# Altium PCB wzy_PCB1_01.PcbDoc
Units mil, origin at the board's own origin, x right, y up, seen from the top; angles counter-clockwise.
Board outline 3220.03 x 2005.03 mil, 2 copper layers (Top Layer, Bottom Layer); 58 components, 42 nets, 180 pads, 181 vias.
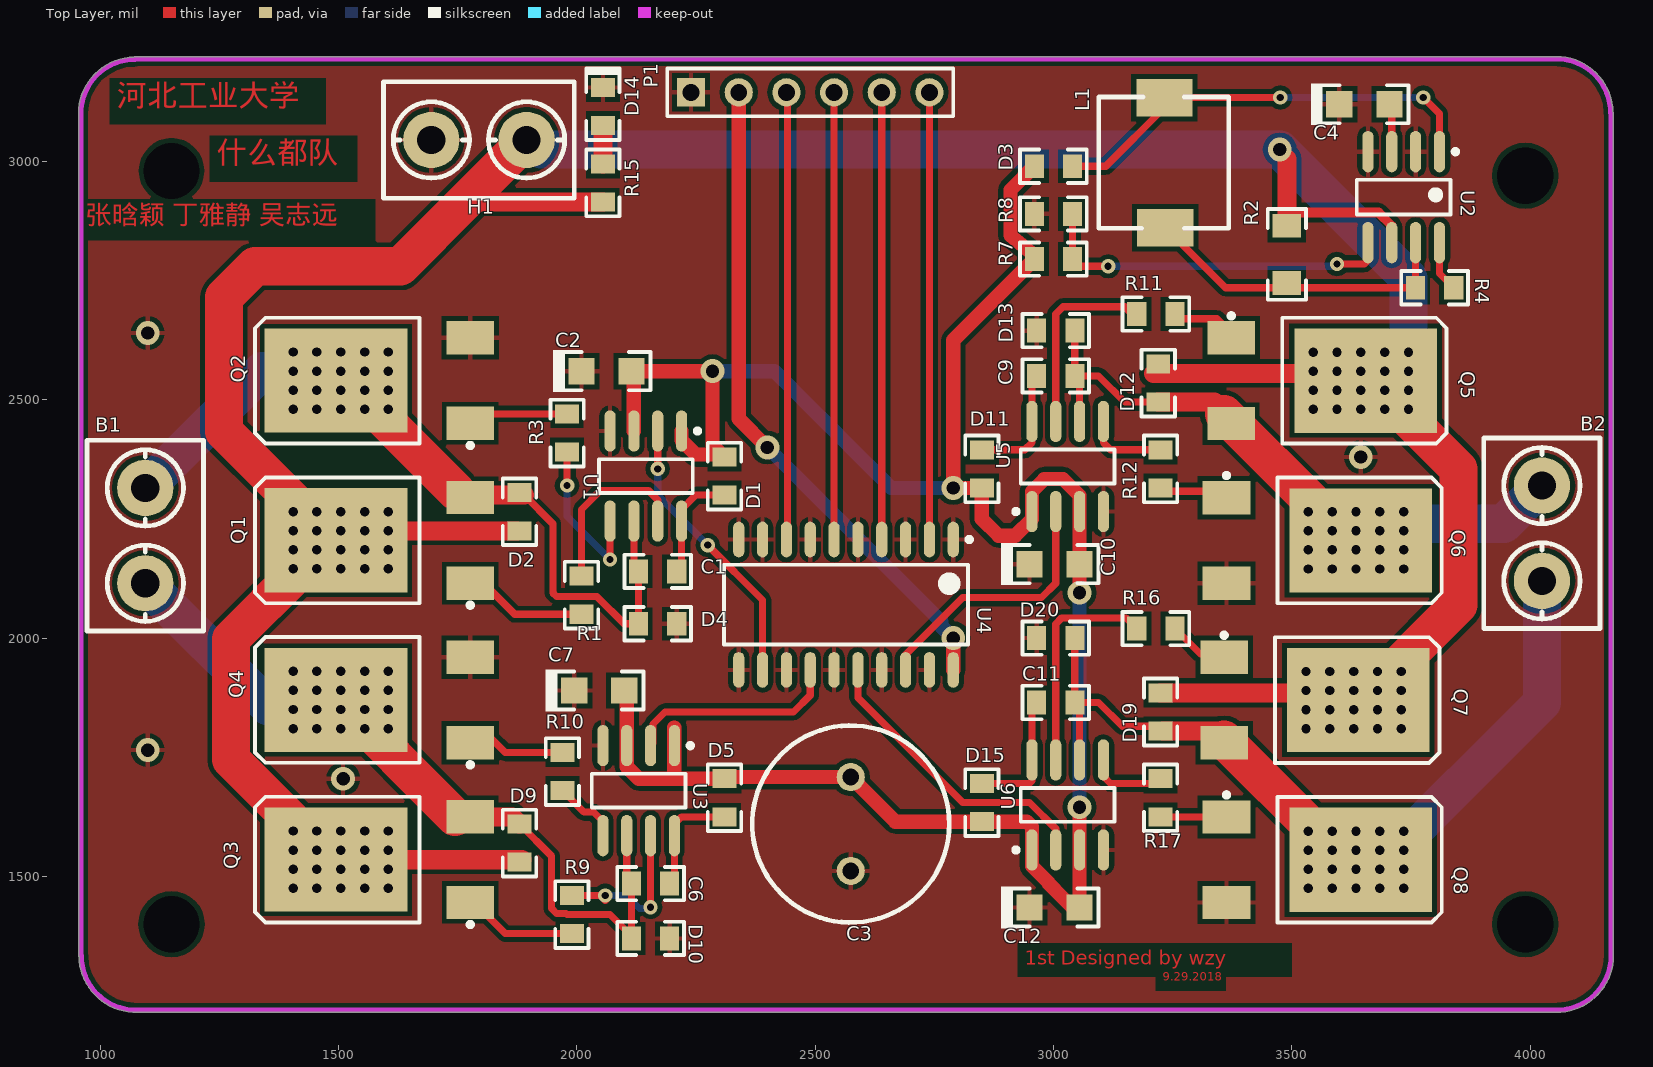
[diagram p0: Top Layer view]
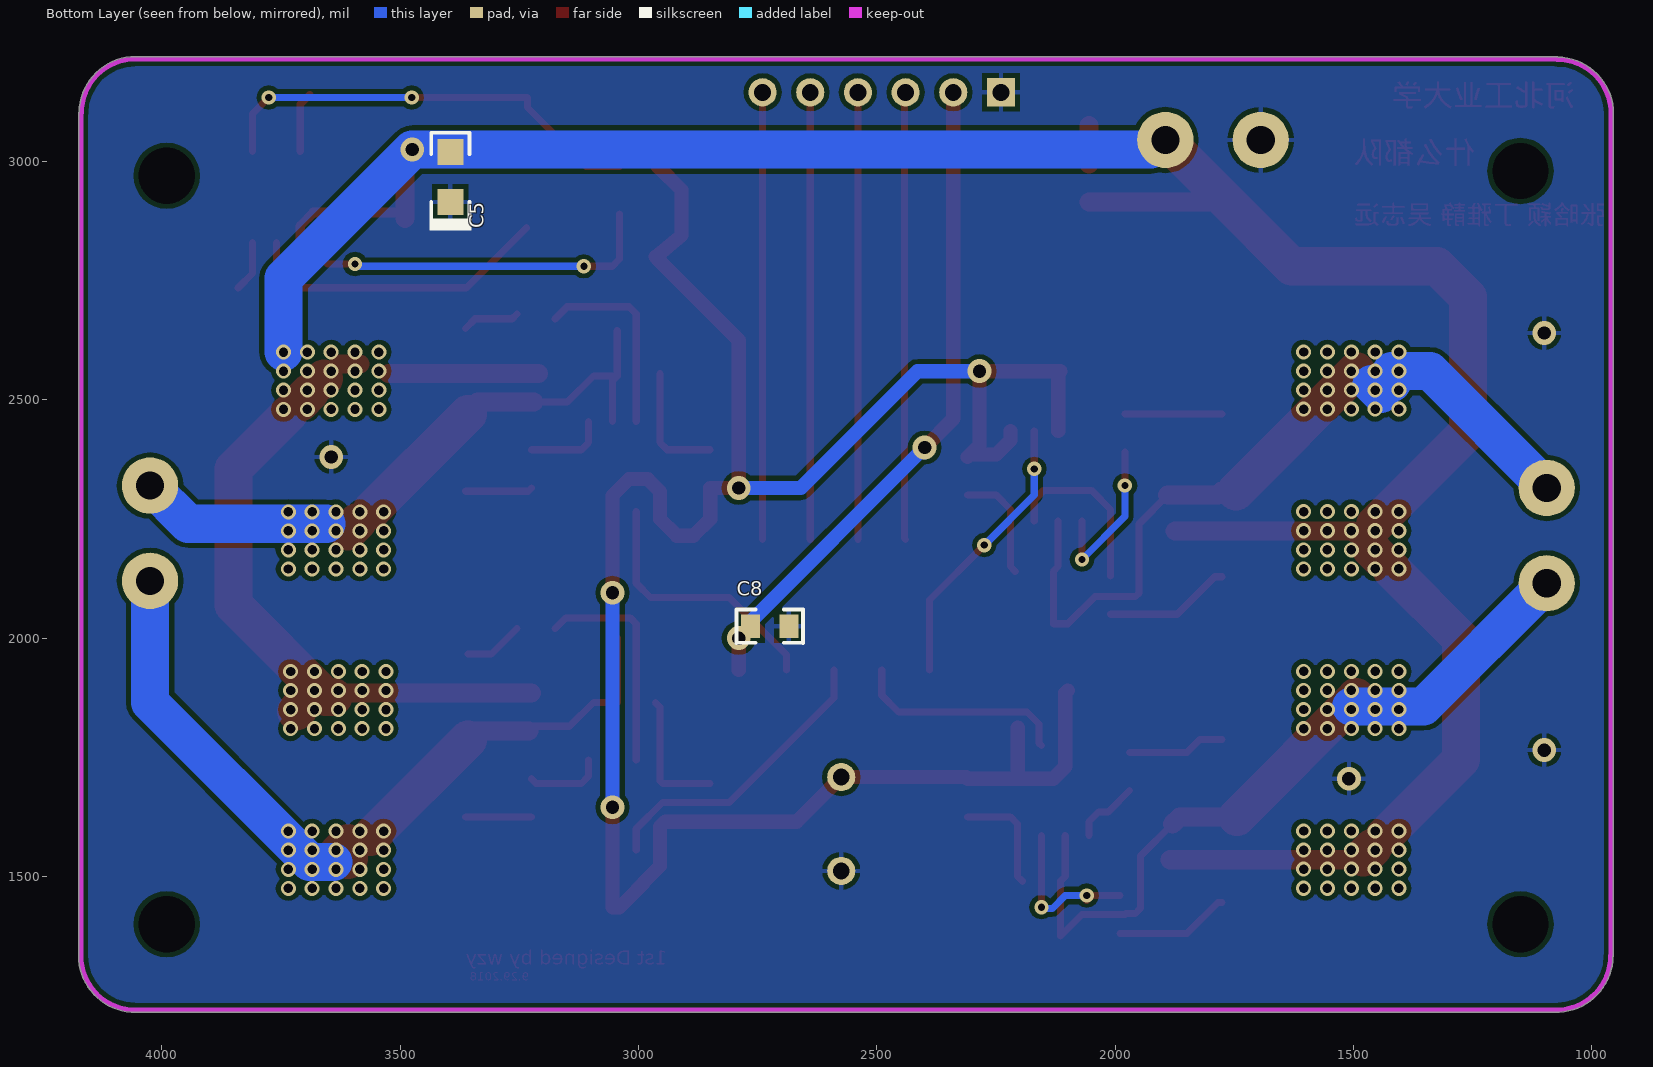
[diagram p1: Bottom Layer view, seen from below]

## Layer stack, top to bottom
Top Layer: signal copper 1.4
Dielectric: dielectric 12.6, FR-4, Dk 4.8
Bottom Layer: signal copper 1.4

## Board outline
1068.72,1215.15 cw(c1075,1334.02) 955.98,1332 cw(c960,1335) 954.99,1335 954.99,3100 cw(c1074.02,3100) 1072,3219.02 cw(c1075,3215) 1075,3220.01 4055,3220.01 cw(c4055,3100.98) 4174.02,3103 cw(c4170,3100) 4175.02,3100 4175.02,1410 cw(c4170,1410) 4175.01,1409.71 4175.01,1334.01 cw(c4055.97,1334.01) 4054.97,1214.98 cw(c4055.97,1334.01) 4054.96,1214.99 4055,1214.98 1070,1214.98 cw(c1070,1220)

## Design rules (kind name [scope] priority, off if disabled: settings)
Clearance [All] p1: gap=10
PolygonConnect [All] p1: connectstyle=Relief reliefconductorwidth=10 reliefentries=4 polygonreliefangle="90 Angle" airgapwidth=10
RoutingVias [All] p1: holewidth=28 width=50 viastyle="Through Hole" minholewidth=28 minwidth=50 maxholewidth=28 maxwidth=50
SolderMaskExpansion [All] p1: expansion=4
Width [All] p1: maxlimit=100 minlimit=1 preferedwidth=10 minimp=50.000000 maximp=50.000000 favimp=50.000000
28 further rules are at their usual default settings.

## Components (designator, comment, footprint, x,y, rotation, side; value= is the part's Value field where it differs from the comment)
B1 "Motor" KF301-2P 1095,2215 r180 top
B2 "Motor" KF301-2P 4025,2220 r180 top
C1 "Cap" 0805(2012) 2170,2140 r180 top
C2 "Cap Pol1" SOD-323(0805) 2060,2560 r180 top
C3 "Cap Pol1" RB5-10.5 2575,1610 r270 top
C4 "Cap Pol1" SOD-323(0805) 3650,3120 r180 top
C5 "Cap Pol1" SOD-323(0805) 3395,2965 r270 bottom
C6 "Cap" 0805(2012) 2155,1485 r180 top
C7 "Cap Pol1" SOD-323(0805) 2045,1890 r180 top
C8 "Cap" 0805(2012) 2725,2025 r0 bottom
C9 "Cap" 0805(2012) 3005,2550 r0 top
C10 "Cap Pol1" SOD-323(0805) 3000,2155 r180 top
C11 "Cap" 0805(2012) 3005,1865 r0 top
C12 "Cap Pol1" SOD-323(0805) 3000,1435 r180 top
D1 "1N5819" 0805(2012) 2310,2340 r90 top
D2 "1N5819" 0805(2012) 1880,2265 r90 top
D3 "1N5819" 0805(2012) 3000,2990 r0 top
D4 "1N5819" 0805(2012) 2170,2030 r0 top
D5 "1N5819" 0805(2012) 2310,1665 r90 top
D9 "1N5819" 0805(2012) 1880,1570 r90 top
D10 "1N5819" 0805(2012) 2155,1370 r0 top
D11 "1N5819" 0805(2012) 2850,2355 r270 top
D12 "1N5819" 0805(2012) 3220,2535 r270 top
D13 "1N5819" 0805(2012) 3005,2645 r180 top
D14 "RED" 0805LED 2055,3115 r90 top
D15 "1N5819" 0805(2012) 2850,1655 r270 top
D19 "1N5819" 0805(2012) 3225,1845 r270 top
D20 "1N5819" 0805(2012) 3005,2000 r180 top
H1 "POWER IN" KF301-2P 1795,3045 r270 top
L1 "Inductor" diangan 3155,3160 r90 top
P1 "PWM" HDR1X6 2240,3145 r0 top
Q1 "IR7843" LR7843 1635,2205.2 r0 top
Q2 "IR7843" LR7843 1635,2540.2 r0 top
Q3 "IR7843" LR7843 1635,1535.2 r0 top
Q4 "IR7843" LR7843 1635,1870.2 r0 top
Q5 "IR7843" LR7843 3515,2540 r180 top
Q6 "IR7843" LR7843 3505,2205 r180 top
Q7 "IR7843" LR7843 3500,1870 r180 top
Q8 "IR7843" LR7843 3505,1535 r180 top
R1 "Res2" 0805(2012) 2010,2090 r270 top
R2 "Res2" 1206(3216) 3560,2860 r90 top
R3 "Res2" 0805(2012) 1980,2430 r90 top
R4 "Res2" 0805(2012) 3800,2735 r180 top
R7 "Res2" 0805(2012) 3000,2795 r0 top
R8 "Res2" 0805(2012) 3000,2890 r0 top
R9 "Res2" 0805(2012) 1990,1420 r270 top
R10 "Res2" 0805(2012) 1970,1720 r90 top
R11 "Res2" 0805(2012) 3215,2680 r0 top
R12 "Res2" 0805(2012) 3225,2355 r270 top
R15 "Res2" 0805(2012) 2055,2955 r90 top
R16 "Res2" 0805(2012) 3215,2020 r0 top
R17 "Res2" 0805(2012) 3225,1665 r270 top
U1 "IR2104S" IR2104S 2145,2340 r270 top
U2 "MC34063" MC34063 3735,2925 r270 top
U3 "IR2104S" IR2104S 2130,1680 r270 top
U4 "74LS244" 74ls244DA 2595,2150 r270 top
U5 "IR2104S" IR2104S 3030,2360 r90 top
U6 "IR2104S" IR2104S 3030,1650 r90 top

## Footprints (in the part's own frame and the unit in brackets; to place one, negate y for a bottom-side part, rotate by r counter-clockwise, add the part's x,y. Pads: shape width x height; smd on the part's side, far side on the other; paste and mask are expansions set on the pad)
74ls244DA [mm]
  oval 1.9x0.6 smd: 1(-1.443,4.953) 2(-1.443,3.683) 3(-1.443,2.413) 4(-1.443,1.143) 5(-1.443,-0.127) 6(-1.443,-1.397) 7(-1.443,-2.667) 8(-1.443,-3.937) 9(-1.443,-5.207) 10(-1.443,-6.477) 11(5.507,-6.477) 12(5.507,-5.207) 13(5.507,-3.937) 14(5.507,-2.667) 15(5.507,-1.397) 16(5.507,-0.127) 17(5.507,1.143) 18(5.507,2.413) 19(5.507,3.683) 20(5.507,4.953)
  silkscreen extent -1.57,-7.26 4.16,5.93, body extent -0.77,-7.26 4.83,5.74, height 2.2
0805(2012) [mil]
  rect 40x50 smd: 1(-40,0) 2(40,0)
  silkscreen extent -70,-35 70,35
0805LED [mil]
  rect 40x50 smd: 1(-40,0) 2(40,0)
  silkscreen extent -70,-35 80,35
1206(3216) [mil]
  rect 50x60 smd: 1(-115,70) 2(5,70)
  silkscreen extent -150,30 40,110
diangan [mil]
  rect 78.74x118.11 smd: 1(-299,-80) 2(-26,-78)
  silkscreen extent -300,-213 -25,60
HDR1X6 [mm] "Connector; Header; 6 Position"
  rect 1.5x1.5 hole 0.9: 1(0,0)
  round 1.5 hole 0.9: 2(2.54,0) 3(5.08,0) 4(7.62,0) 5(10.16,0) 6(12.7,0)
  silkscreen extent -1.27,-1.27 13.97,1.27
IR2104S [mm]
  oval 2.2x0.6 smd: 1(-2.4,1.905) 2(-2.4,0.635) 3(-2.4,-0.635) 4(-2.4,-1.905) 5(2.4,-1.905) 6(2.4,-0.635) 7(2.4,0.635) 8(2.4,1.905)
  silkscreen extent -2.52,-2.5 0.9,2.88, body extent -2,-2.5 2,2.5, height 1.55
KF301-2P [mm]
  round 3 hole 1.5: 1(0,-2.54) 2(0,2.54)
  silkscreen extent -3.1,-5.08 3.1,5.08
LR7843 [mm]
  rect 2.54x1.778 smd: 1(3.6,-2.28) 3(3.6,2.28)
  rect 7.6x5.55 smd: 2(-3.556,0)
  silkscreen extent -7.87,-3.58 3.73,3.35
MC34063 [mm] "SOIC, 8-Leads, Body 4.90x3.90mm, Pitch 1.27mm, IPC Medium Density"
  oval 2.2x0.6 smd: 1(-2.425,1.905) 2(-2.425,0.635) 3(-2.425,-0.635) 4(-2.425,-1.905) 5(2.425,-1.905) 6(2.425,-0.635) 7(2.425,0.635) 8(2.425,1.905)
  silkscreen extent -2.55,-2.5 0.93,2.88, body extent -2,-2.5 2,2.5, height 1.5
RB5-10.5 [mm] "Capacitor (Radial); 2 Leads"
  round 1.5 hole 0.9: 1(-2.5,0) 2(2.5,0)
  silkscreen extent -5.25,-5.25 5.25,5.25
SOD-323(0805) [mil]
  rect 55x55 smd: 1(-55,0) 2(50,0)
  silkscreen extent -95,-44 110,44

## Part data
B1 B2: library part "Motor Servo", "Servo Motor"
C1 C6 C8 C9 C11: "Capacitor"
C2 C3 C4 C5 C7 C10 C12: "Polarized Capacitor (Radial)"
D1 D2 D3 D4 D5 D9 D10 D11 D12 D13 D15 D19 D20: library part 1N4148, "Silicon Epitaxial Planar Diode for Various Detector, Modulator, Demodulator"
D14: library part LED2, "Typical RED, GREEN, YELLOW, AMBER GaAs LED"
P1: library part "Header 6", "Header, 6-Pin"
Q1 Q2 Q3 Q4 Q5 Q6 Q7 Q8: "N-Channel Power MOSFET"
R1 R2 R3 R4 R7 R8 R9 R10 R11 R12 R15 R16 R17: "Resistor"

## Free pads (board coordinates)
  round 60 hole 118.11: 1(1150,1400) 1(1150,2980) 2(3990,1400) 2(3990,2970)

## Via types
v1: diameter 31.5, hole 19.68, Top Layer to Bottom Layer, 160 vias
v2: diameter 50, hole 28, Top Layer to Bottom Layer, 11 vias
v3: diameter 30, hole 15, Top Layer to Bottom Layer, 10 vias

## Nets (pads, with @x,y where several pads share a name; then routed paths per layer and width w, separated by ;. In a path a pad name is that pad's centre, name@x,y a point inside that pad or via, vN(x,y) a via of type N, cw(c..) or ccw(c..) an arc to the next point about the centre after c; other vN are vias at no path point)
5V: C8.2 P1.2 U4.20 | length 1395.3
  Top Layer w30: P1.2@2330,3145 2340,3135 2340,2460 v2(2400,2400) ; U4.20 2790,1990 2785,1995 v2(2790,2000)
  Bottom Layer w30: v2@2400,2390 v2(2400,2400) ; v2@2415,2385 2765,2035 C8.2 v2(2790,2000)
12V: C2.1 C3.1 C7.1 C10.1 C12.1 D1.2 D3.1 D5.2 D11.2 D15.2 R7.1 U1.1 U1.3 U3.1 U3.3 U5.1 U5.3 U6.1 U6.3 | length 4681.8
  Top Layer w30: C7.1 2105,1885 2105,1730 2130,1705 2205,1705 ; U1.3 2120,2555 C2.1 2275,2560 2285,2550 2285,2405 D1.2@2305,2385 ; U3.1@2205,1812.5 2205,1705 ; U1.1 2220,2415 2250,2385 D1.2@2305,2385 ; D1.2 D1.2@2305,2385 ; R7.1 2790,2625 v2(2790,2315) D11.2 2850,2250 2885,2215 2920,2215 2955,2250 U5.1 2955,2307.64 2981.18,2333.82 3020.25,2333.82 3055,2299.07 U5.3 C10.1 v2(3055,2095) ; D3.1 2910,2940 2910,2845 R7.1@2964.1,2799.92 ; v2(3055,1645) U6.3 C12.1 3040,1435 3002.5,1472.5 3002.5,1472.86 2989.75,1485.6 2989.75,1487.2 2955,1521.96 U6.1 2955,1604.04 2944.04,1615 D15.2 2668.43,1615 C3.1 2313.43,1708.43 D5.2 2205,1705
  Bottom Layer w30: v2@2295,2560 2415,2560 2660,2315 v2(2790,2315) ; v2(3055,1645) v2(3055,2095)
  other v2: 2285,2560
GND: C2.2 C3.2 C4.2 C5.2 C7.2 C8.1 C10.2 C12.2 D4.2 D10.2 D13.2 D14.2 D20.2 H1.1 P1.1 Q2.3 Q4.3 Q6.3 Q8.3 R8.1 U1.4 U2.2 U2.4 U3.4 U4.1 U4.3 U4.5 U4.7 U4.9 U4.10 U4.11 U4.13 U4.15 U4.17 U4.19 U5.4 U6.4
  other v2: 1510,1705 1100,1765 3645,2380 1100,2640
"MOTOR IN1": U4.18 U5.2 | length 559.5
  Top Layer w15: U4.18 2690,1965 2810,2085 2975,2085 3005,2115 U5.2
"MOTOR IN2": U4.16 U6.2 | length 631.6
  Top Layer w15: U4.16 2590,1875 2810,1655 2950,1655 3005,1600 U6.2
"MOTOR IN3": U3.2 U4.14 | length 455.6
  Top Layer w15: U3.2 2160,1779.49 2160,1820 2185,1845 2455,1845 2490,1880 U4.14
"MOTOR IN4": U1.2 U4.12 | length 596.6
  Top Layer w15: U1.2 v3(2170,2355) v3@2175,2350 ; v3(2275,2195) 2390,2080 U4.12
  Bottom Layer w15: v3@2175,2350 2170,2345 2170,2300 v3(2275,2195)
NetB1_1: B1.1 C1.2 D2.2 D4.1 Q1.3 Q2.2 U1.6 | length 1609
  Top Layer w15: D2.2@1890,2300 1950,2240 1950,2095 1957.5,2087.5 2042.25,2087.5 2099.75,2030 D4.1 C1.2 2120,2150 U1.6
  Top Layer w40: Q1.3@1776.73,2308.16 1784.9,2300 D2.2@1890,2300
  Top Layer w80: Q2.2@1495,2560 Q1.3@1746.84,2308.16
  Bottom Layer w80: B1.1 1340,2560 1420,2560 1420,2535 ; v1@1442.5,2512.5 v1@1462.5,2532.5
  other v1: 1405,2480.2 1455,2480.2 1505,2480.2 1555,2480.2 1605,2480.2 1405,2520.2 1455,2520.2 1505,2520.2 1555,2520.2 1605,2520.2 1405,2560.2 1455,2560.2 1505,2560.2 1555,2560.2 1605,2560.2 1405,2600.2 1455,2600.2 1505,2600.2 1555,2600.2 1605,2600.2
NetB1_2: B1.2 C6.2 D9.2 D10.1 Q3.3 Q4.2 U3.6 | length 1624.8
  Top Layer w15: D9.2 1947.5,1542.5 1947.5,1432.75 1957.75,1422.5 1977.5,1422.5 1980,1420 2070,1420 2115,1375 2115,1490 2105,1500 U3.6
  Top Layer w40: Q3.3@1745.04,1624.96 1865.04,1624.96 D9.2
  Top Layer w80: Q4.2@1495,1876.8 1495,1875 Q3.3@1745.04,1624.96
  Bottom Layer w80: B1.2 1353.2,1856.8 1455,1856.8 v1@1505,1856.8
  other v1: 1405,1810.2 1455,1810.2 1505,1810.2 1555,1810.2 1605,1810.2 1405,1850.2 1455,1850.2 1505,1850.2 1555,1850.2 1605,1850.2 1405,1890.2 1455,1890.2 1505,1890.2 1555,1890.2 1605,1890.2 1405,1930.2 1455,1930.2 1505,1930.2 1555,1930.2 1605,1930.2
NetB2_1: B2.1 C9.2 D12.2 D13.1 Q5.3 Q6.2 U5.6 | length 1259.5
  Top Layer w15: D13.1 C9.2 ; U5.6 3055,2540 C9.2 ; D12.2 3150,2495 3095,2550 C9.2
  Top Layer w40: D12.2 3338.31,2495 Q5.3@3358.27,2470.04
  Top Layer w80: Q5.3@3358.27,2470.04 Q6.2@3560.05,2268.25 ; Q6.2@3590.05,2243.25 Q6.2@3610.05,2223.25
  Bottom Layer w80: 3655,2240 3945,2240 B2.1
  other v1: 3535,2145 3585,2145 3635,2145 3685,2145 3735,2145 3535,2185 3585,2185 3635,2185 3685,2185 3735,2185 3535,2225 3585,2225 3635,2225 3685,2225 3735,2225 3535,2265 3585,2265 3635,2265 3685,2265 3735,2265
NetB2_2: B2.2 C11.2 D19.2 D20.1 Q7.3 Q8.2 U6.6 | length 1708.6
  Top Layer w15: D20.1 C11.2 ; U6.6 3055,1855 C11.2 ; D19.2@3230,1805 3220,1815 3145,1815 3095,1865 C11.2
  Top Layer w40: D19.2@3230,1805 3355,1805 3358.27,1801.73 Q7.3@3358.27,1786.84
  Top Layer w80: Q7.3@3358.27,1786.84 Q8.2@3562.55,1582.55 ; Q8.2@3607.55,1537.55 Q8.2@3610.1,1535 ; Q8.2@3610,1570 Q8.2@3630,1550
  Bottom Layer w80: 3640,1530 v1@3685,1530 ; 3690,1530 4025,1865 B2.2
  other v1: 3535,1475 3585,1475 3635,1475 3685,1475 3735,1475 3535,1515 3585,1515 3635,1515 3685,1515 3735,1515 3535,1555 3585,1555 3635,1555 3685,1555 3735,1555 3535,1595 3585,1595 3635,1595 3685,1595 3735,1595
NetC1_1: C1.1 D1.1 U1.8 | length 236.6
  Top Layer w15: C1.1 2220,2150 U1.8 2220,2270 2250,2300 D1.1
NetC4_1: C4.1 U2.3 | length 127.8
  Top Layer w15: C4.1@3690,3140 3710,3120 U2.3
NetC6_1: C6.1 D5.1 U3.8 | length 235.4
  Top Layer w15: C6.1@2195,1490 2205,1500 U3.8 2205,1610 2220,1625 D5.1
NetC9_1: C9.1 D11.1 U5.8 | length 256.2
  Top Layer w15: D11.1 2940,2395 2955,2410 U5.8 C9.1@2955,2555
NetC11_1: C11.1 D15.1 U6.8 | length 276.2
  Top Layer w15: D15.1 2950,1695 2955,1700 U6.8 2955,1855 C11.1
NetD3_2: D3.2 L1.2 U2.1 | length 935.6
  Top Layer w15: D3.2 3110,2990 3233,3113 L1.2 v3(3476,3134) ; v3(3776,3134) 3810,3100 U2.1
  Bottom Layer w15: v3(3476,3134) v3(3776,3134)
NetD14_1: D14.1 R15.2 | length 80
  Top Layer w40: R15.2 D14.1
NetL1_1: L1.1 R2.1 R4.2 U2.7 | length 671.7
  Top Layer w15: L1.1 3361,2735 R4.2 U2.7
NetP1_3: P1.3 U4.8 | length 944.4
  Top Layer w15: P1.3@2430,3145 2442.5,3132.5 2442.5,2209.31 U4.8
NetP1_4: P1.4 U4.6 | length 942.3
  Top Layer w15: P1.4@2530,3145 2540,3135 U4.6
NetP1_5: P1.5 U4.4 | length 942.3
  Top Layer w15: P1.5@2630,3145 2640,3135 U4.4
NetP1_6: P1.6 U4.2 | length 942.3
  Top Layer w15: P1.6@2730,3145 2740,3135 U4.2
NetQ1_1: Q1.1 R1.2 | length 265.8
  Top Layer w15: Q1.1@1776.73,2128.64 1791.36,2128.64 1870,2050 R1.2
NetQ2_1: Q2.1 R3.2 | length 203.4
  Top Layer w15: Q2.1@1776.73,2470.24 1979.76,2470.24 R3.2
NetQ3_1: Q3.1 R9.2 | length 240.4
  Top Layer w15: Q3.1 1784.57,1445.43 1850,1380 R9.2
NetQ4_1: Q4.1 R10.2 | length 204.5
  Top Layer w15: Q4.1@1776.73,1787.03 1822.97,1787.03 1850,1760 R10.2
NetQ5_1: Q5.1 R11.2 | length 120.9
  Top Layer w15: R11.2 3265,2670 3342.83,2670 Q5.1@3363.27,2649.57
NetQ6_1: Q6.1 R12.2 | length 141.2
  Top Layer w15: R12.2 3232.03,2307.97 Q6.1@3363.27,2307.97
NetQ7_1: Q7.1 R16.2 | length 125.5
  Top Layer w15: R16.2 3308.64,1966.36 Q7.1@3358.27,1966.36
NetQ8_1: Q8.1 R17.2 | length 138.4
  Top Layer w15: R17.2 3225.24,1624.76 Q8.1
NetR1_1: R1.1 U1.7 | length 369.3
  Top Layer w15: R1.1 2010,2270 2050,2310 2150,2310 2170,2290 U1.7
NetR3_1: R3.1 U1.5 | length 342.8
  Top Layer w15: v3(1980,2320) R3.1 ; v3(2070,2165) U1.5
  Bottom Layer w15: v3(1980,2320) 1980,2255 v3(2070,2165)
NetR4_1: R4.1 U2.8 | length 107
  Top Layer w15: U2.8 3810,2765 R4.1
NetR7_2: R7.2 R8.2 U2.5 | length 763.3
  Top Layer w15: R8.2 R7.2 3055,2780 v3(3115,2780) ; v3(3595,2785) 3652.36,2785 3660,2792.64 U2.5
  Bottom Layer w15: v3(3115,2780) 3590,2780 v3(3595,2785)
NetR9_1: R9.1 U3.7 | length 324.9
  Top Layer w15: R9.1 2050,1460 v3@2060,1450 ; U3.7 v3(2155,1435.5) v3@2157.5,1433
  Bottom Layer w15: 2075,1460 2105,1460 2132,1433 2157.5,1433 v3(2155,1435.5)
  other v3: 2060,1460
NetR10_1: R10.1 U3.5 | length 141.4
  Top Layer w15: R10.1 2015,1635 2035,1635 2055,1615 U3.5
NetR11_1: R11.1 U5.7 | length 412.1
  Top Layer w15: U5.7 3005,2680 3020,2695 3150,2695 R11.1@3175,2670
NetR12_1: R12.1 U5.5 | length 170.7
  Top Layer w15: U5.5 3105,2410 3120,2395 R12.1
NetR16_1: R16.1 U6.7 | length 469.9
  Top Layer w15: U6.7 3005,2029.75 3017.75,2042.5 3152.5,2042.5 R16.1
NetR17_1: R17.1 U6.5 | length 164.8
  Top Layer w15: U6.5 3105,1710 3120,1695 3215,1695 R17.1
VBAT: C5.1 D2.1 D9.1 D12.1 D19.1 H1.2 Q1.2 Q3.2 Q5.2 Q7.2 R2.2 R15.1 U2.6 | length 7193.3
  Top Layer w20: 3497.16,2892.84 3682.16,2892.84 3710,2865 U2.6
  Top Layer w40: Q3.2@1485.2,1535 D9.1@1885,1535 ; Q1.2@1495,2218.4 1501.6,2225 D2.1@1875,2225 ; 1765,2915 R15.1 ; D12.1@3210,2555 Q5.2@3525,2555 ; D19.1 Q7.2@3621.6,1885 ; R2.2@3490,2880 3490,3005 ; Q5.2@3585,2575 Q5.2@3629.8,2575
  Top Layer w80: Q1.2@1420,2143.4 1275,1998.4 1275,1745.2 Q3.2@1435,1585.2 ; Q1.2@1445,2168.4 Q1.2@1465,2188.4 ; Q1.2@1455,2238.4 1260,2433.4 1260,2715 1325,2780 1630,2780 1765,2915 H1.2 ; Q3.2@1460,1560.2 Q3.2@1480,1540.2 ; Q7.2@3640,1876.6 3656.6,1876.6 3850,2070 3850,2354.8 Q5.2@3734.9,2469.9 ; Q5.2@3659.9,2544.9 Q5.2@3664.9,2539.9 ; Q5.2@3689.9,2514.9 Q5.2@3709.9,2494.9 ; Q7.2@3714.2,1850.8 Q7.2@3719.2,1845.8
  Bottom Layer w80: H1.2@1895,3055 1925,3025 2580,3025 v2(3475,3025) 3745,2755 v1(3745,2600)
  other v1: 1405,1475.2 1455,1475.2 1505,1475.2 1555,1475.2 1605,1475.2 1405,1515.2 1455,1515.2 1505,1515.2 1555,1515.2 1605,1515.2 1405,1555.2 1455,1555.2 1505,1555.2 1555,1555.2 1605,1555.2 1405,1595.2 1455,1595.2 1505,1595.2 1555,1595.2 1605,1595.2 3530,1810 3580,1810 3630,1810 3680,1810 3730,1810 3530,1850 3580,1850 3630,1850 3680,1850 3730,1850 3530,1890 3580,1890 3630,1890 3680,1890 3730,1890 3530,1930 3580,1930 3630,1930 3680,1930 3730,1930 1405,2145.2 1455,2145.2 1505,2145.2 1555,2145.2 1605,2145.2 1405,2185.2 1455,2185.2 1505,2185.2 1555,2185.2 1605,2185.2 1405,2225.2 1455,2225.2 1505,2225.2 1555,2225.2 1605,2225.2 1405,2265.2 1455,2265.2 1505,2265.2 1555,2265.2 1605,2265.2 3545,2480 3595,2480 3645,2480 3695,2480 3745,2480 3545,2520 3595,2520 3645,2520 3695,2520 3745,2520 3545,2560 3595,2560 3645,2560 3695,2560 3745,2560 3545,2600 3595,2600 3645,2600 3695,2600

## Polygon pours and split planes (outlines as drawn)
GND on Top Layer "Bottom Layer-No Net" (solid, remove dead copper, pour order 2): 845,3265 850,3270 4350,3270 4350,845 4345,840 850,840
GND on Bottom Layer "Bottom Layer-No Net" (solid, remove dead copper, pour order 4): 835,3345 4335,3345 4340,3350 4430,3260 4430,790 745,790 680,855

## Keep-outs
Keep-Out Layer:
  lines w10: 960,1335 960,1400 960,3030 960,3100 cw(c1074.02,3100) 1074.02,3214.02 ; 960.98,1334.02 ccw(c1075,1334.02) 1075,1220 ; 1070,1220 1140,1220 3980,1220 4055,1220 ccw(c4055.97,1334.01) 4169.99,1334.01 4169.99,1409.99 ; 1075,3215 1145,3215 3980,3215 ; 3955,3215 4055,3215 cw(c4055,3100.98) 4169.02,3100.98 4170,3100 4170,3025 4170,1780 4170,1410 ; 4169.99,1409.99 4170,1410

## Other copper
Top Layer:
  text "河北工业大学" at 1035,3100 h80
  text "什么都队" at 1245,2980 h80
  text "张晗颖 丁雅静 吴志远" at 970,2855 h70
  text "1st Designed by wzy" at 2940,1315 h30
  text "9.29.2018" at 3230,1275 h30

## Silkscreen, mask and mechanical layers (free items; w line width, h text height)
Top Paste:
  lines w40: 1610,1535 1885,1535 ; 1615,2225 1875,2225 ; 1880,1535 1885,1540 ; 3210,2555 3585,2555 3595,2545 ; 3225,1885 3540,1885
  lines w80: 1420,1600 1360,1660 1280,1740 1275,1740 1275,2000 1285,2010 1425,2150 1425,2165 ; 1430,2250 1430,2265 1260,2435 1260,2635 1260,2720 1320,2780 1630,2780 1895,3045 ; 1555,1815 1745,1625 ; 1570,2520 1570,2485 1745,2310 ; 3360,1785 3555,1590 3560,1590 ; 3362.5,2467.5 3545,2285 ; 3675,2520 3685,2520 3850,2355 3850,2105 3850,2070 3737.5,1957.5
Bottom Paste:
  lines w80: 1095,2115 1355,1855 ; 1095,2315 1340,2560 ; 1910,3025 2580,3025 3475,3025 3735,2765 3735,2760 3745,2750 3745,2665 3745,2615 ; 3080,2525 3110,2525 ; 3735,2238.2 3943.2,2238.2 4025,2320 ; 3742.5,1582.5 4025,1865 4025,2120
Top Solder:
  lines w40: 1610,1535 1895,1535 ; 1610,2223.4 1888.4,2223.4 ; 1870,1525 1880,1515 ; 3205,2555 3510,2555 ; 3228.4,1885 3315.4,1885 3443,1885 3530,1885
  lines w80: 1395,2275 1395,2300 1260,2435 1260,2715 1325,2780 1630,2780 1895,3045 ; 1415,2135 1275,1995 1275,1755 1275,1745 1420,1600 ; 1570,1840 1570,1800 1740,1630 ; 1590,2465 1755,2300 1770,2300 ; 3360,1785 3420,1725 3535,1610 ; 3375,2450 3525,2300 ; 3535,1602.5 3535,1610 ; 3710,2495 3850,2355 3850,2070 3720,1940 ; 3720,1930 3740,1910 ; 3535,1610 3535,1595 3535,1610
Bottom Solder:
  lines w80: 1095,2115 1100,2115 1360,1855 1440,1855 ; 1095,2315 1340,2560 1405,2560 ; 1910,3025 2580,3025 3475,3025 3745,2755 3745,2615 ; 3670,2240 3945,2240 4025,2320 ; 3715,1555 4025,1865 4025,2120